# EAGLE board qPCR_pcb_breakout_ADG731BSUZ (EAGLE 9.6.1)
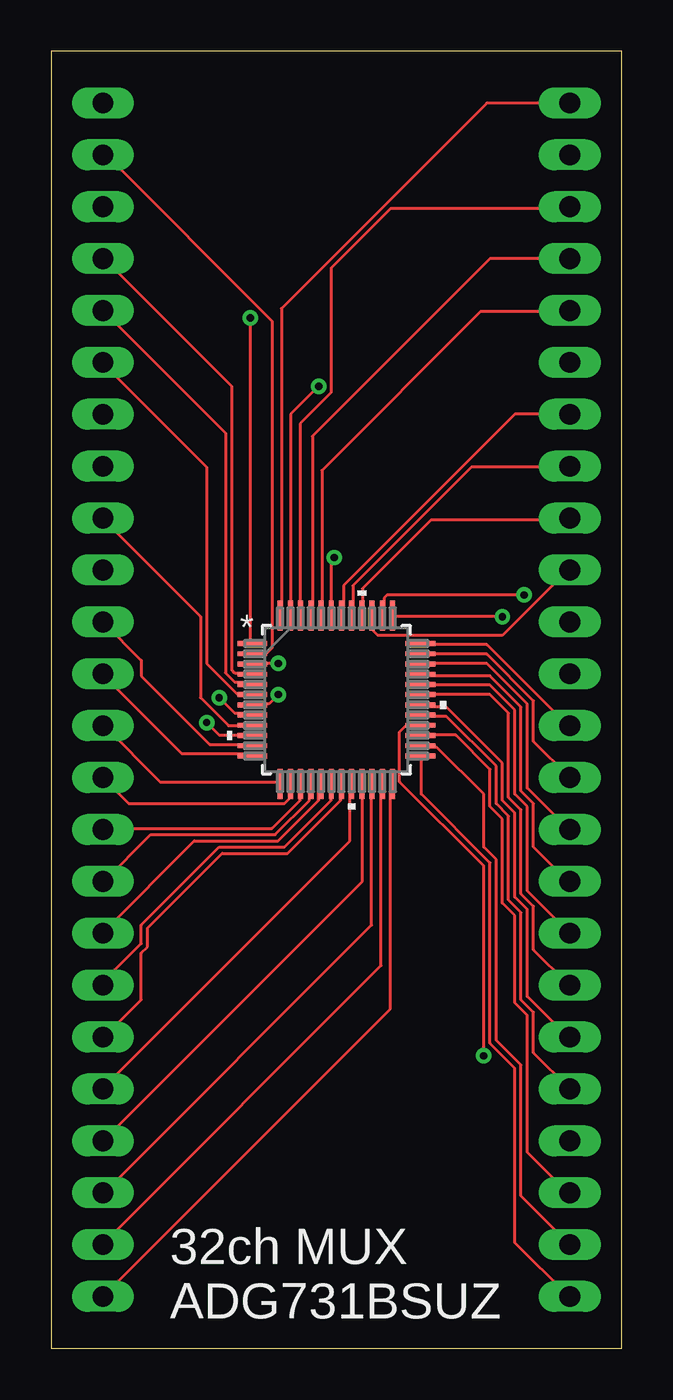
[diagram p0: board, top side]
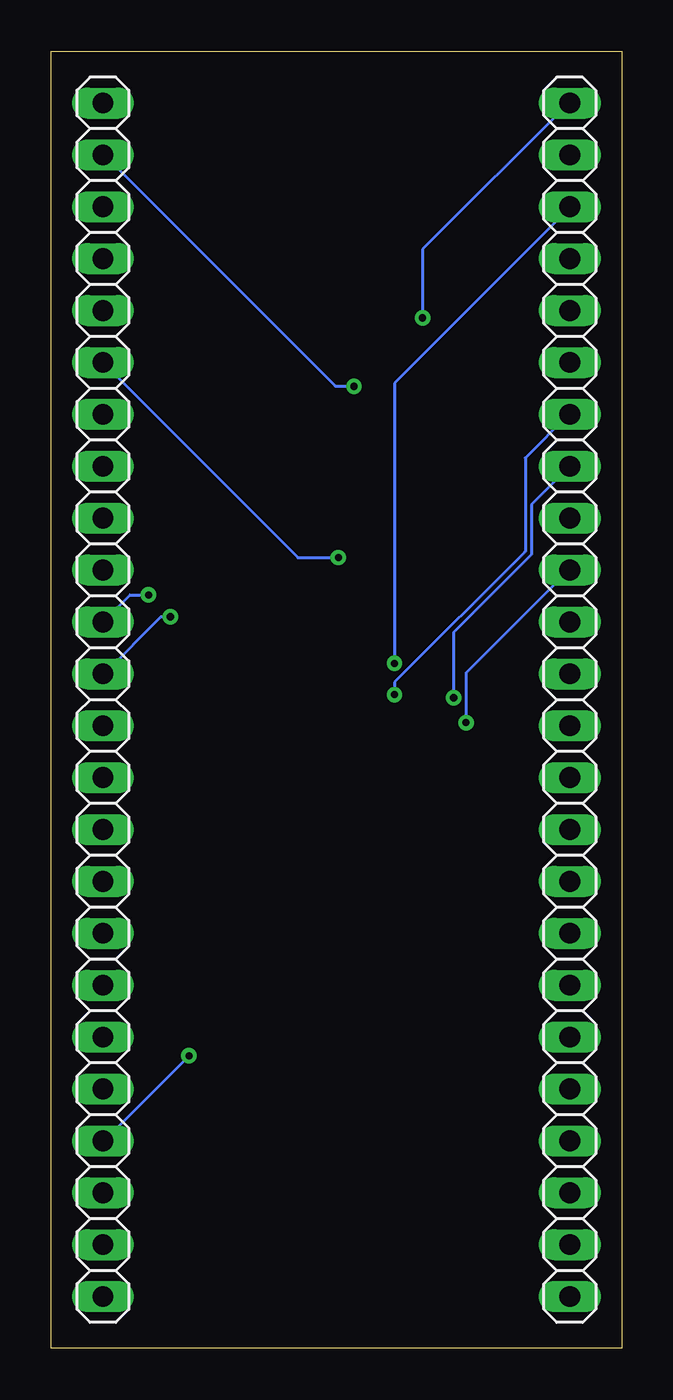
[diagram p1: board, bottom side, seen from below]

Size 27.94 x 63.5 mm. Coordinates in mm from the lower left corner, seen from the top.
Outline: 0,0 27.94,0 27.94,63.5 0,63.5 0,0
Copper layers (1*16): Top 0.035mm / dielectric 1.5mm / Bottom 0.035mm
Design rules "default": minimum track width 6mil, minimum drill 0.35mm, track to track 6mil, track to pad 6mil, pad to pad 6mil, via to via 6mil, smd to smd 6mil, copper to edge 40mil, drill to drill 6mil, minimum pad ring 10mil, minimum via ring 8mil, stop-mask expansion 4mil, vias tented up to drill 0mil, thermal gap 10mil

## Footprints (pad centres in the part's own frame; a part is rotated, then mirrored left to right if it is on the bottom)
1X24 = drill 1.016 long: 1 -29.21,0; 2 -26.67,0; 3 -24.13,0; 4 -21.59,0; 5 -19.05,0; 6 -16.51,0; 7 -13.97,0; 8 -11.43,0; 9 -8.89,0; 10 -6.35,0; 11 -3.81,0; 12 -1.27,0; 13 1.27,0; 14 3.81,0; 15 6.35,0; 16 8.89,0; 17 11.43,0; 18 13.97,0; 19 16.51,0; 20 19.05,0; 21 21.59,0; 22 24.13,0; 23 26.67,0; 24 29.21,0
SU_48_ADI = smd 1.462 x 0.239: 1 -4.115,2.75; 2 -4.115,2.25; 3 -4.115,1.75; 4 -4.115,1.25; 5 -4.115,0.75; 6 -4.115,0.25; 7 -4.115,-0.25; 8 -4.115,-0.75; 9 -4.115,-1.25; 10 -4.115,-1.75; 11 -4.115,-2.25; 12 -4.115,-2.75; 25 4.115,-2.75; 26 4.115,-2.25; 27 4.115,-1.75; 28 4.115,-1.25; 29 4.115,-0.75; 30 4.115,-0.25; 31 4.115,0.25; 32 4.115,0.75; 33 4.115,1.25; 34 4.115,1.75; 35 4.115,2.25; 36 4.115,2.75 | smd 0.239 x 1.462: 13 -2.75,-4.115; 14 -2.25,-4.115; 15 -1.75,-4.115; 16 -1.25,-4.115; 17 -0.75,-4.115; 18 -0.25,-4.115; 19 0.25,-4.115; 20 0.75,-4.115; 21 1.25,-4.115; 22 1.75,-4.115; 23 2.25,-4.115; 24 2.75,-4.115; 37 2.75,4.115; 38 2.25,4.115; 39 1.75,4.115; 40 1.25,4.115; 41 0.75,4.115; 42 0.25,4.115; 43 -0.25,4.115; 44 -0.75,4.115; 45 -1.25,4.115; 46 -1.75,4.115; 47 -2.25,4.115; 48 -2.75,4.115

## Placement (x,y rotation side)
JP1  [1X24]  2.54,31.75 270 bottom
JP2  [1X24]  25.4,31.75 270 bottom
U1  ADG731BSUZ  [SU_48_ADI]  13.97,31.75 0 top

## Library data of the parts
JP1 JP2 = pinhead
U1 = Ninja_qPCR; BUILT_BY: EMA_UL_Team; MANUFACTURER_PART_NUMBER: ADG731BSUZ; SOURCELIBRARY: Analog_2012-01-01_7; VENDOR: Analog Devices Inc

## Nets
1: JP1.1 U1.1
2: JP1.2 U1.2
3: JP1.3 U1.3
4: JP1.4 U1.4
5: JP1.5 U1.5
6: JP1.6 U1.6
7: JP1.7 U1.7
8: JP1.8 U1.8
9: JP1.9 U1.9
10: JP1.10 U1.10
11: JP1.11 U1.11
12: JP1.12 U1.12
13: JP1.13 U1.13
14: JP1.14 U1.14
15: JP1.15 U1.15
16: JP1.16 U1.16
17: JP1.17 U1.17
18: JP1.18 U1.18
19: JP1.19 U1.19
20: JP1.20 U1.20
21: JP1.21 U1.21
22: JP1.22 U1.22
23: JP1.23 U1.23
24: JP1.24 U1.24
25: JP2.24 U1.25
26: JP2.23 U1.26
27: JP2.22 U1.27
28: JP2.21 U1.28
29: JP2.20 U1.29
30: JP2.19 U1.30
31: JP2.18 U1.31
32: JP2.17 U1.32
33: JP2.16 U1.33
34: JP2.15 U1.34
35: JP2.14 U1.35
36: JP2.13 U1.36
37: JP2.12 U1.37
38: JP2.11 U1.38
39: JP2.10 U1.39
40: JP2.9 U1.40
41: JP2.8 U1.41
42: JP2.7 U1.42
43: JP2.6 U1.43
44: JP2.5 U1.44
45: JP2.4 U1.45
46: JP2.3 U1.46
47: JP2.2 U1.47
48: JP2.1 U1.48

## Tracks (layer width: path | path; a pad name or v marks a point on that pad's centre or on a via)
1  (via drill 0.35)
  Top 0.152: v9.75,50.44 9.75,34.59 U1.1
  Bottom 0.152: v9.75,50.44 9.75,53.8 2.59,60.96 JP1.1
2
  Top 0.152: U1.2 9.91,33.98 10.52,33.98 10.82,34.29 10.82,50.29 2.59,58.52 JP1.2
3  (via drill 0.35)
  Top 0.152: v11.12,33.53 9.91,33.53 U1.3
  Bottom 0.152: v11.12,33.53 11.12,47.24 2.59,55.78 JP1.3
4
  Top 0.152: U1.4 9.75,33.07 8.99,33.07 8.84,33.22 8.84,47.09 2.59,53.34 JP1.4
5
  Top 0.152: JP1.5 8.53,44.81 8.53,33.07 8.99,32.61 9.75,32.61 U1.5
6
  Top 0.152: U1.6 9.75,32 9.14,32 7.62,33.53 7.62,43.13 2.59,48.16 JP1.6
7  (via drill 0.35)
  Top 0.152: v11.12,32 10.67,31.55 9.91,31.55 U1.7
  Bottom 0.152: v11.12,32 11.12,32.61 4.72,39.01 4.72,43.59 2.59,45.72 JP1.7
8  (via drill 0.35)
  Top 0.152: v8.23,31.85 8.99,31.09 9.75,31.09 U1.8
  Bottom 0.152: v8.23,31.85 8.23,35.05 4.42,38.86 4.42,41.3 JP1.8
9
  Top 0.152: U1.9 9.75,30.48 8.69,30.48 7.32,31.85 7.32,35.81 2.59,40.54 JP1.9
10  (via drill 0.35)
  Top 0.152: v7.62,30.63 8.23,30.02 9.75,30.02 U1.10
  Bottom 0.152: v7.62,30.63 7.62,33.07 2.59,38.1 JP1.10
11
  Top 0.152: JP1.11 4.42,33.68 4.42,32.92 7.77,29.57 9.75,29.57 U1.11
12
  Top 0.152: U1.12 9.75,29.11 6.4,29.11 2.59,32.92 JP1.12
13
  Top 0.152: U1.13 11.12,27.74 5.33,27.74 2.59,30.48 JP1.13
14
  Top 0.152: JP1.14 3.81,26.67 11.43,26.67 11.73,26.98 11.73,27.58 U1.14
15
  Top 0.152: U1.15 12.19,27.58 12.19,26.82 10.82,25.45 2.59,25.45 JP1.15
16
  Top 0.152: U1.16 12.65,27.58 12.65,26.82 10.97,25.15 4.88,25.15 2.59,22.86 JP1.16
17
  Top 0.152: U1.17 13.11,27.58 13.11,26.82 11.12,24.84 7.01,24.84 2.59,20.42 JP1.17
18
  Top 0.152: U1.18 13.72,27.58 13.72,26.82 11.43,24.54 8.23,24.54 4.42,20.73 4.42,19.81 2.44,17.83 JP1.18
19
  Top 0.152: U1.19 14.17,27.58 14.17,26.82 11.58,24.23 8.38,24.23 4.72,20.57 4.72,19.66 4.42,19.36 4.42,17.07 2.59,15.24 JP1.19
20
  Top 0.152: U1.20 14.63,27.58 14.63,24.84 2.59,12.8 JP1.20
21
  Top 0.152: JP1.21 15.24,22.86 15.24,27.58 U1.21
22
  Top 0.152: U1.22 15.7,27.58 15.7,20.73 2.59,7.62 JP1.22
23
  Top 0.152: U1.23 16.15,27.58 16.15,18.75 2.59,5.18 JP1.23
24
  Top 0.152: JP1.24 16.61,16.61 16.61,27.58 U1.24
25
  Top 0.152: U1.25 18.14,28.96 18.14,27.13 21.49,23.77 21.49,14.94 22.71,13.72 22.71,5.18 25.3,2.59 JP2.24
26
  Top 0.152: JP2.23 23.01,7.47 23.01,13.87 21.79,15.09 21.79,23.93 21.18,24.54 21.18,27.13 18.9,29.41 18.14,29.41 U1.26
27
  Top 0.152: U1.27 18.14,30.02 19.81,30.02 21.49,28.35 21.49,26.52 22.1,25.91 22.1,21.79 22.71,21.18 22.71,16.92 23.32,16.31 23.32,9.6 25.3,7.62 JP2.22
28  (via drill 0.35)
  Top 0.152: v21.18,14.33 21.18,23.62 17.07,27.74 17.07,30.18 17.37,30.48 17.98,30.48 U1.28
  Bottom 0.152: v21.18,14.33 25.3,10.21 JP2.21
29
  Top 0.152: JP2.20 23.62,14.48 23.62,16.46 23.01,17.07 23.01,21.34 22.4,21.95 22.4,26.06 21.79,26.67 21.79,28.5 19.36,30.94 18.14,30.94 U1.29
30
  Top 0.152: U1.30 18.14,31.39 19.36,31.39 22.1,28.65 22.1,26.82 22.71,26.21 22.71,22.1 23.32,21.49 23.32,17.22 25.3,15.24 JP2.19
31
  Top 0.152: U1.31 18.14,32 21.49,32 22.4,31.09 22.4,26.98 23.01,26.36 23.01,22.25 23.62,21.64 23.62,19.51 25.3,17.83 JP2.18
32
  Top 0.152: JP2.17 23.32,22.4 23.32,26.52 22.71,27.13 22.71,31.24 21.49,32.46 18.14,32.46 U1.32
33
  Top 0.152: U1.33 18.14,32.92 21.49,32.92 23.01,31.39 23.01,27.28 23.62,26.67 23.62,24.54 25.3,22.86 JP2.16
34
  Top 0.152: U1.34 18.14,33.53 21.34,33.53 23.32,31.55 23.32,27.43 25.3,25.45 JP2.15
35
  Top 0.152: JP2.14 23.62,29.72 23.62,31.7 21.34,33.98 18.14,33.98 U1.35
36
  Top 0.152: U1.36 18.14,34.44 21.34,34.44 25.3,30.48 JP2.13
37  (via drill 0.35)
  Top 0.152: v22.1,35.81 16.76,35.81 U1.37
  Bottom 0.152: v22.1,35.81 22.55,35.81 25.3,33.07 JP2.12
38  (via drill 0.35)
  Top 0.152: v23.16,36.88 16.46,36.88 16.31,36.73 16.31,35.97 U1.38
  Bottom 0.152: v23.16,36.88 24.08,36.88 JP2.11
39
  Top 0.152: U1.39 15.7,35.81 15.7,35.2 16,34.9 22.1,34.9 25.3,38.1 JP2.10
40
  Top 0.152: U1.40 15.24,35.97 15.24,37.19 18.59,40.54 25.3,40.54 JP2.9
41
  Top 0.152: U1.41 14.78,35.97 14.78,37.34 20.57,43.13 25.3,43.13 JP2.8
42
  Top 0.152: JP2.7 22.71,45.72 14.33,37.34 14.33,35.97 U1.42
43  (via drill 0.35)
  Top 0.152: v13.87,38.71 13.72,38.56 13.72,35.97 U1.43
  Bottom 0.152: v13.87,38.71 15.85,38.71 JP2.6
44
  Top 0.152: U1.44 13.26,35.97 13.26,42.98 21.03,50.75 25.3,50.75 JP2.5
45
  Top 0.152: JP2.4 21.49,53.34 12.8,44.65 12.8,35.97 U1.45
46
  Top 0.152: U1.46 12.19,35.97 12.19,45.26 13.72,46.79 13.72,52.88 16.61,55.78 25.3,55.78 JP2.3
47  (via drill 0.35)
  Top 0.152: v13.11,47.09 11.73,45.72 11.73,35.97 U1.47
  Bottom 0.152: v13.11,47.09 14.02,47.09 25.3,58.37 JP2.2
48
  Top 0.152: JP2.1 21.34,60.96 11.28,50.9 11.28,35.97 U1.48

## Text on the board
tPlace: 32ch MUX / ADG731BSUZ